# Altium PCB Pin_Expansion.PcbDoc
Units mm, origin at the board's own origin, x right, y up, seen from the top; angles counter-clockwise.
Board outline 45 x 47.5 mm, 2 copper layers (Top Layer, Bottom Layer); 3 components, 44 nets, 99 pads, 25 vias.
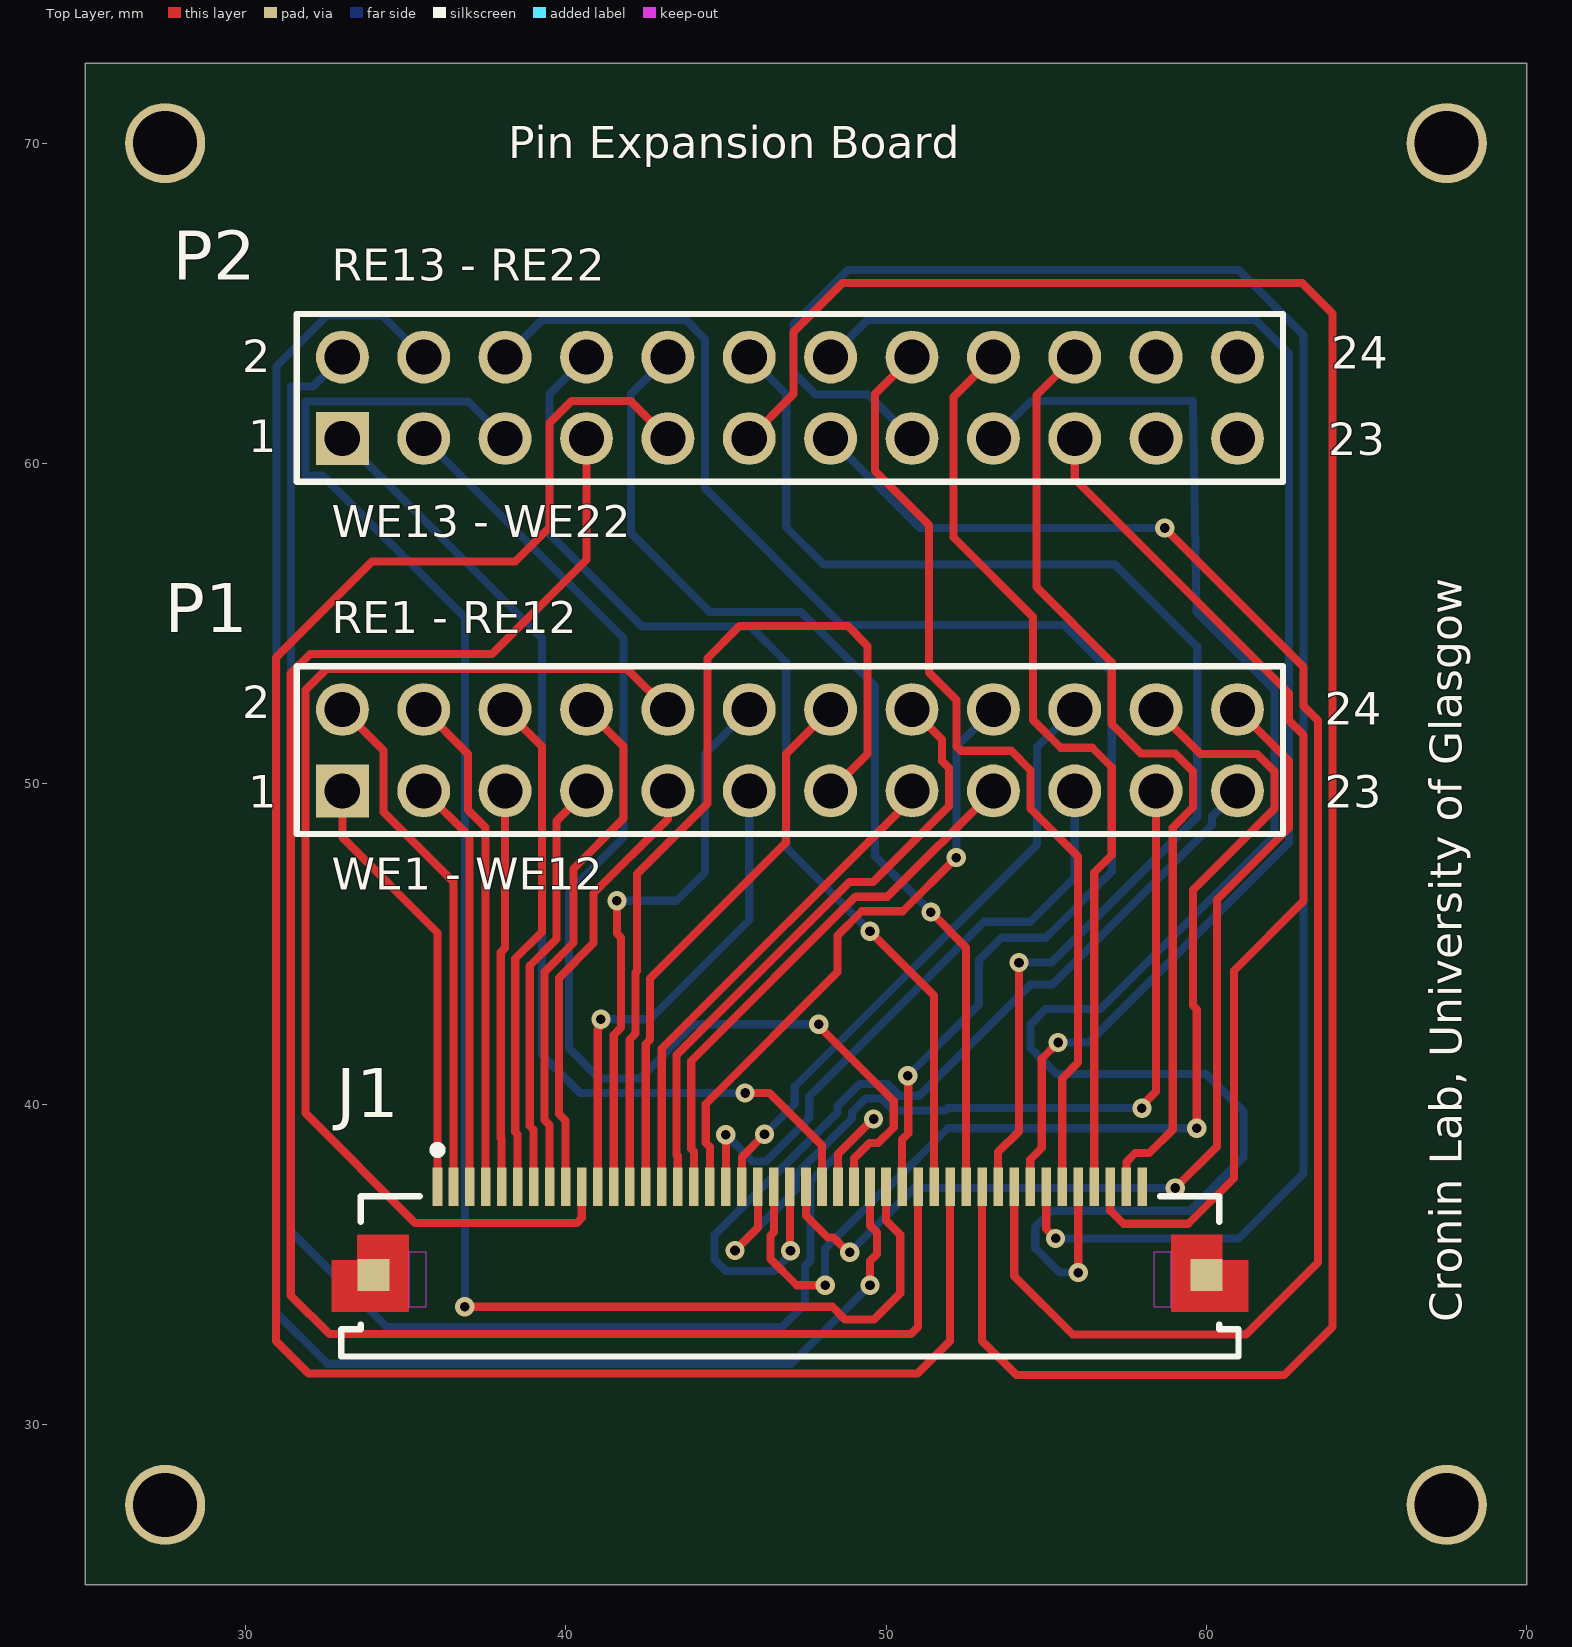
[diagram p0: Top Layer view]
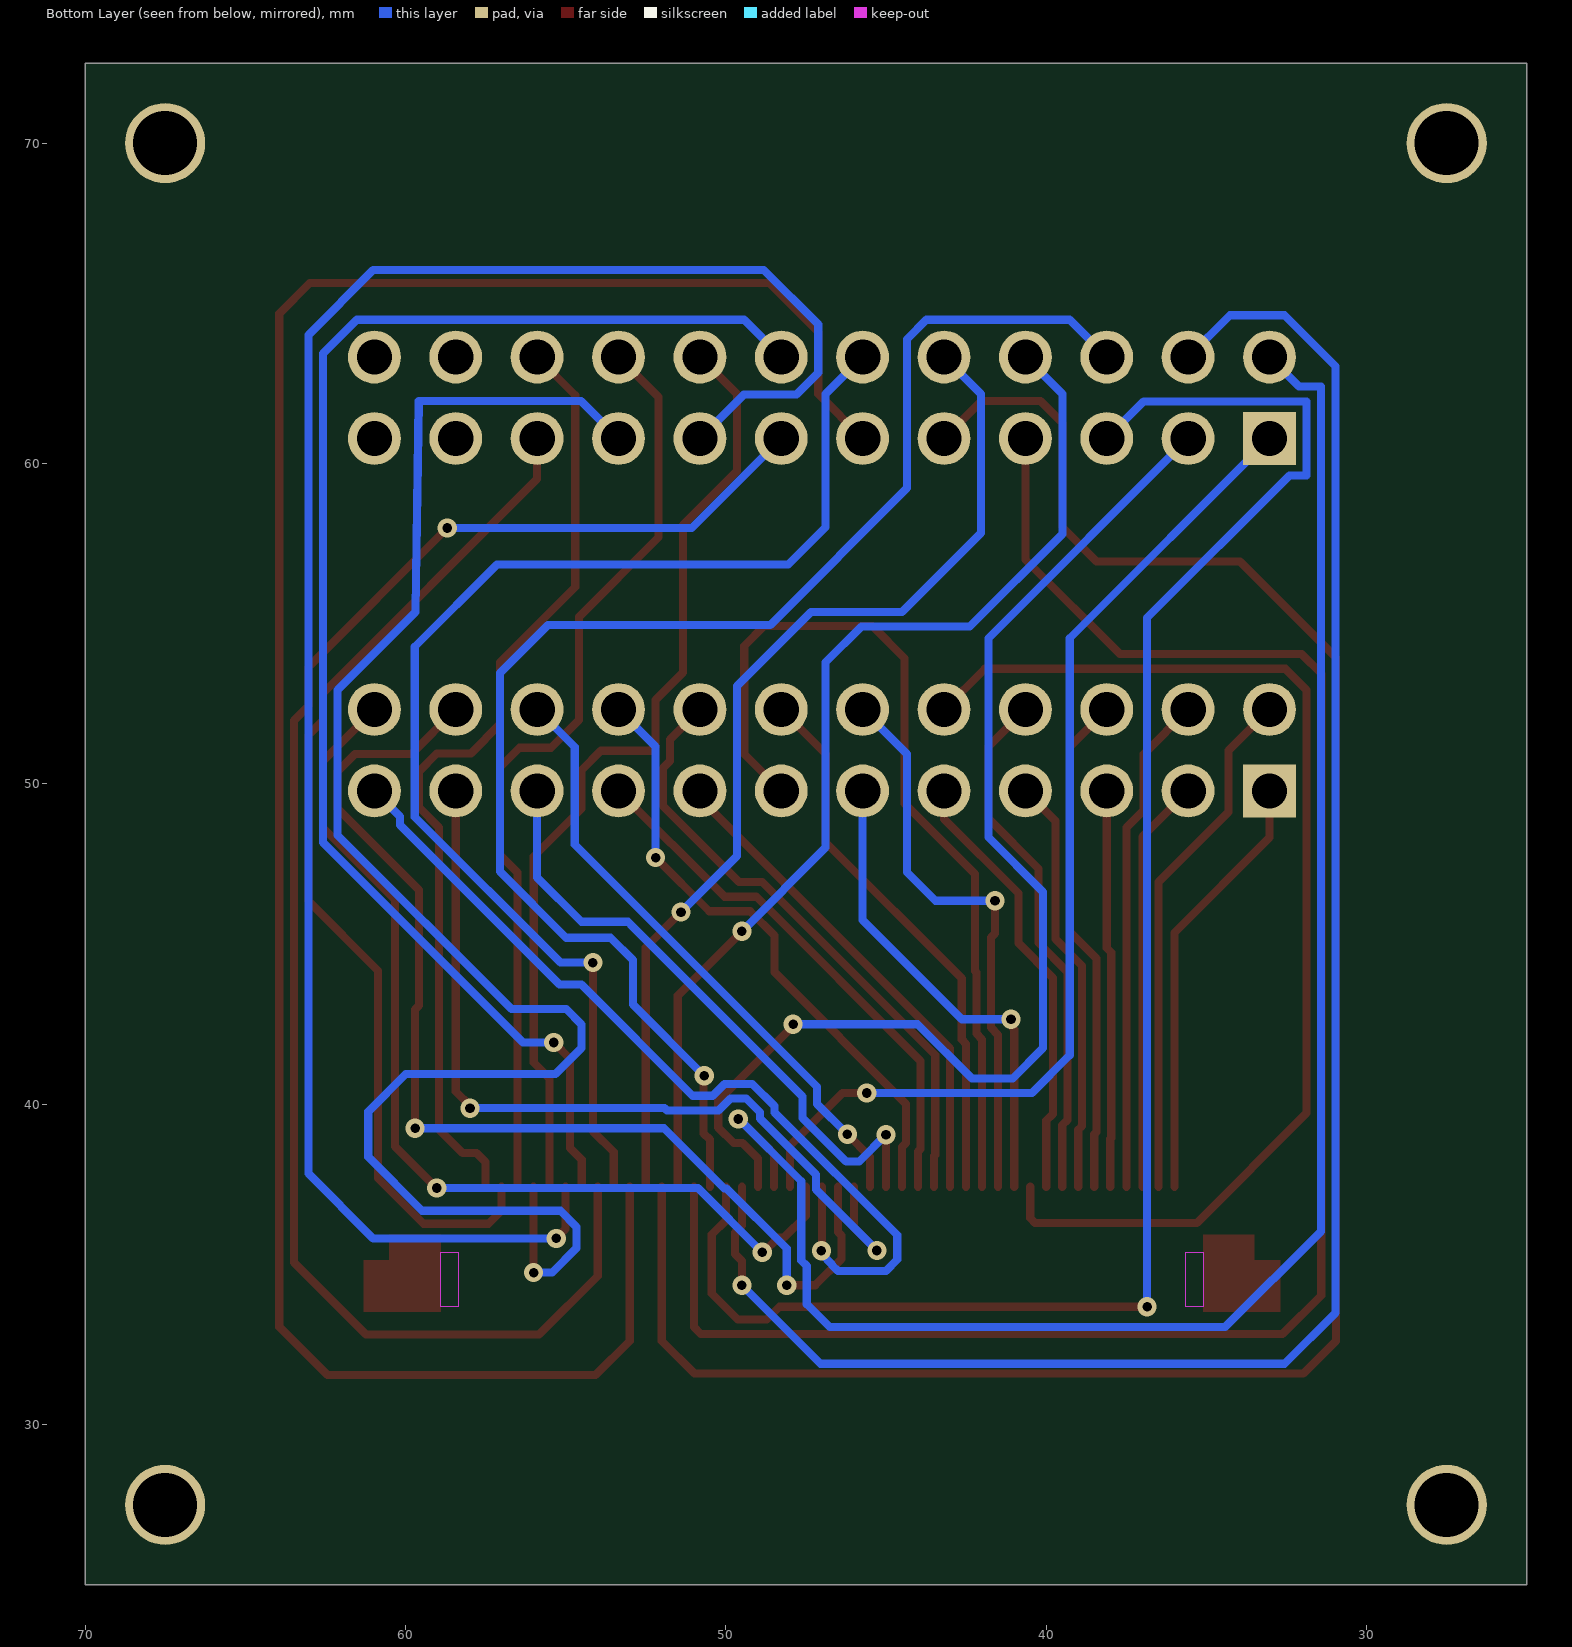
[diagram p1: Bottom Layer view, seen from below]
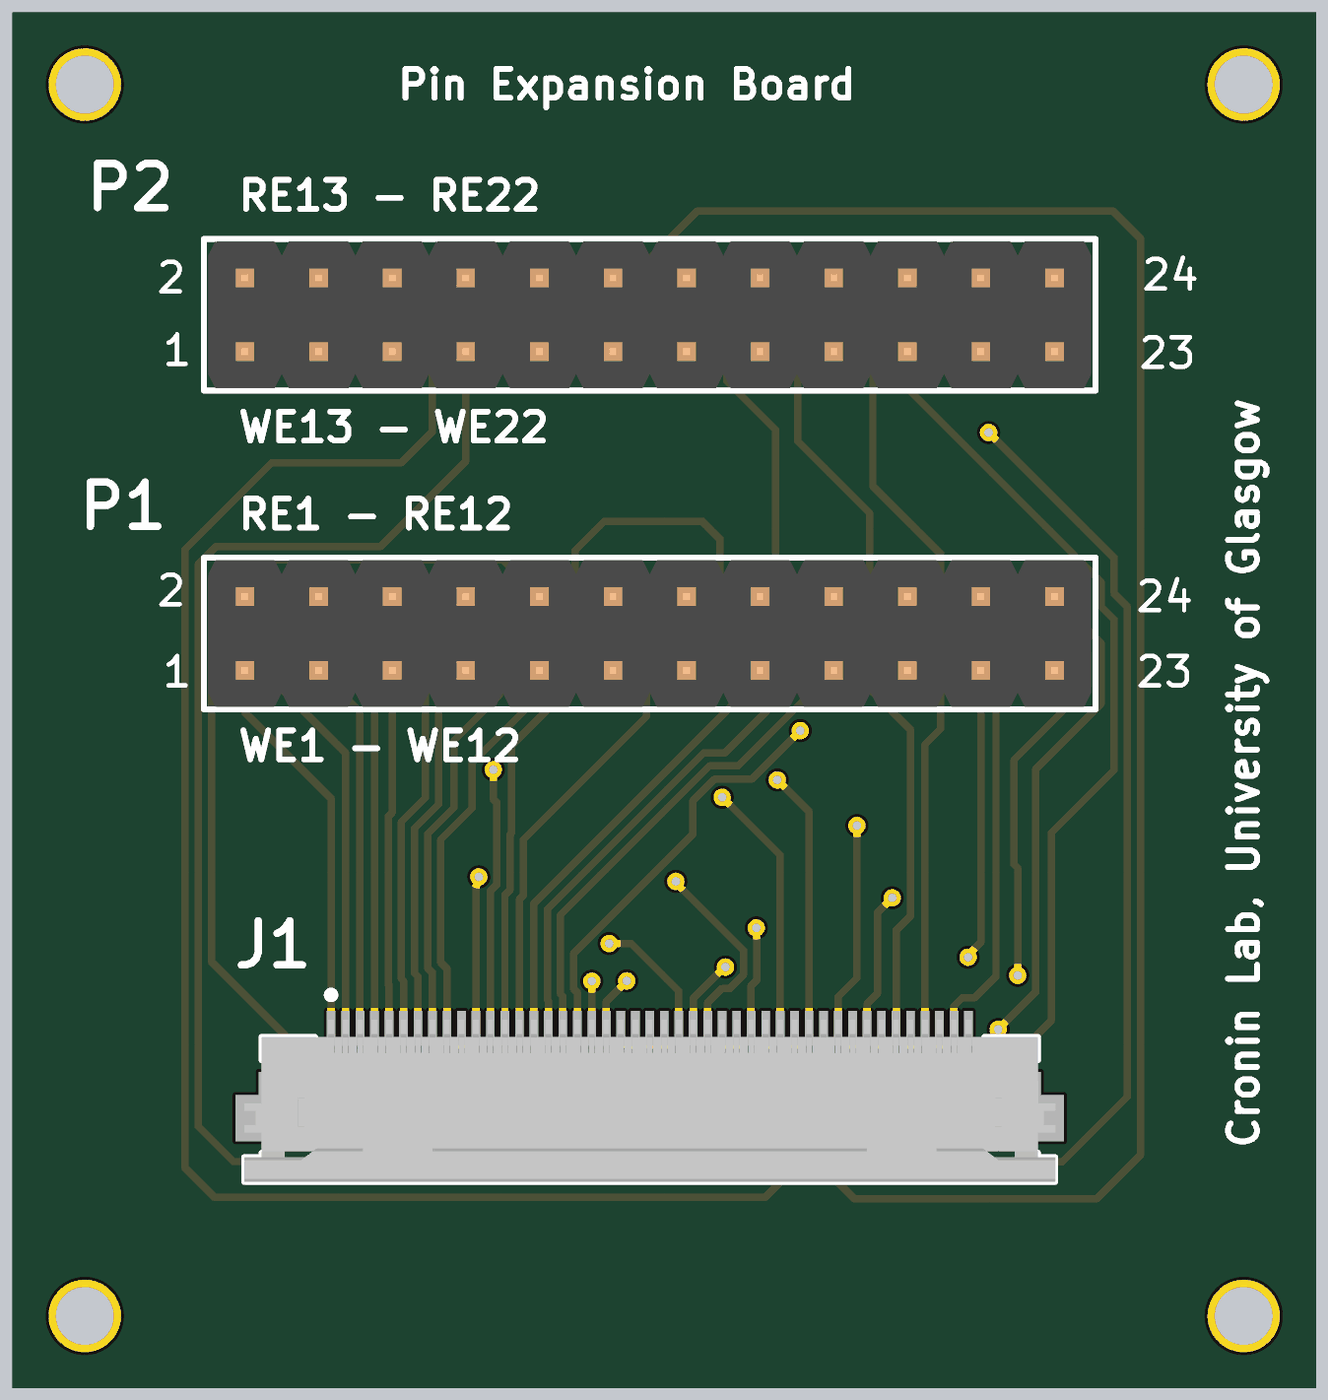
[diagram p2: 3D render of the assembled board from above, using the file's embedded part models]

## Layer stack, top to bottom
Top Solder: solder mask 0.0102, Solder Resist, Dk 3.5
Top Layer: signal copper 0.0356
Dielectric 1: dielectric 0.32, FR-4, Dk 4.8
Bottom Layer: signal copper 0.0356
Bottom Solder: solder mask 0.0102, Solder Resist, Dk 3.5

## Board outline
25,25 70,25 70,72.5 25,72.5

## Design rules (kind name [scope] priority, off if disabled: settings)
Clearance [All] p1: gap=0.2 ignorepadtopadclearanceinfootprint=FALSE
PolygonConnect [All] p1: connectstyle=Relief reliefconductorwidth=0.254 reliefentries=4 polygonreliefangle="90 Angle" airgapwidth=0.254
RoutingVias [All] p1: holewidth=0.3 width=0.6 viastyle="Through Hole" minholewidth=0.3 minwidth=0.6 maxholewidth=0.3 maxwidth=0.6
SMDNeckDown [All] p1: percent=100.000
SolderMaskExpansion [All] p1: expansion=0.102 istentingtop=FALSE
Width [All] p1: maxlimit=0.254 minlimit=0.254 preferedwidth=0.254
30 further rules are at their usual default settings.

## Components (designator, comment, footprint, x,y, rotation, side; value= is the part's Value field where it differs from the comment)
J1 "54132-4562" MOLX-54132-4562 47,36.054 r0 top
P1 "61302421121" 61302421121 47,51.054 r0 top
P2 "61302421121" 61302421121 47,62.054 r0 top

## Footprints (in the part's own frame and the unit in brackets; to place one, negate y for a bottom-side part, rotate by r counter-clockwise, add the part's x,y. Pads: shape width x height; smd on the part's side, far side on the other; paste and mask are expansions set on the pad)
61302421121 [mm] "Pin Header, pitch 2.54 mm, THT, Vertical, dual row, 24p"
  rect 1.65x1.65 hole 1.1: 1(-13.97,-1.27)
  round 1.65 hole 1.1: 2(-13.97,1.27) 3(-11.43,-1.27) 4(-11.43,1.27) 5(-8.89,-1.27) 6(-8.89,1.27) 7(-6.35,-1.27) 8(-6.35,1.27) 9(-3.81,-1.27) 10(-3.81,1.27) 11(-1.27,-1.27) 12(-1.27,1.27) 13(1.27,-1.27) 14(1.27,1.27) 15(3.81,-1.27) 16(3.81,1.27) 17(6.35,-1.27) 18(6.35,1.27) 19(8.89,-1.27) 20(8.89,1.27) 21(11.43,-1.27) 22(11.43,1.27) 23(13.97,-1.27) 24(13.97,1.27)
  silkscreen extent -15.39,-2.62 15.39,2.61, body extent -15.24,-2.54 15.24,2.54, height 8.59
MOLX-54132-4562 [mm] "FPC Connector, 45-Leads, Right Angle, Pitch 0.5 mm, Mated Height 2.0 mm, SMT"
  rect 0.3x1.2 smd: 1(-11,1.375) 2(-10.5,1.375) 3(-10,1.375) 4(-9.5,1.375) 5(-9,1.375) 6(-8.5,1.375) 7(-8,1.375) 8(-7.5,1.375) 9(-7,1.375) 10(-6.5,1.375) 11(-6,1.375) 12(-5.5,1.375) 13(-5,1.375) 14(-4.5,1.375) 15(-4,1.375) 16(-3.5,1.375) 17(-3,1.375) 18(-2.5,1.375) 19(-2,1.375) 20(-1.5,1.375) 21(-1,1.375) 22(-0.5,1.375) 23(0,1.375) 24(0.5,1.375) 25(1,1.375) 26(1.5,1.375) 27(2,1.375) 28(2.5,1.375) 29(3,1.375) 30(3.5,1.375) 31(4,1.375) 32(4.5,1.375) 33(5,1.375) 34(5.5,1.375) 35(6,1.375) 36(6.5,1.375) 37(7,1.375) 38(7.5,1.375) 39(8,1.375) 40(8.5,1.375) 41(9,1.375) 42(9.5,1.375) 43(10,1.375) 44(10.5,1.375) 45(11,1.375)
  rect 1x1 smd: MP1(-13,-1.375) MP2(13,-1.375)
  Top Layer region: -11.9,-0.125 -13.5,-0.125 -13.5,-0.925 -14.3,-0.925 -14.3,-2.525 -11.9,-2.525
  Top Layer region: 11.9,-0.125 13.5,-0.125 13.5,-0.925 14.3,-0.925 14.3,-2.525 11.9,-2.525
  Keep-Out Layer region: -11.9,-2.375 -11.35,-2.375 -11.35,-0.675 -11.9,-0.675
  Keep-Out Layer region: 11.9,-0.675 11.35,-0.675 11.35,-2.375 11.9,-2.375
  silkscreen extent -14,-3.92 14,2.65, body extent -14,-3.92 14,1.68, height 2.01

## Part data
J1: library part CMP-1241-00535-1, "0.5 mm Pitch Easy-On(TM) Type FPC Connector, 2.0 mm Mated Height, Right Angle, ZIF, SMT, Bottom Contact, 45 Circuits, -20 to 85 degC, ELV and RoHS Compliant, Tape and Reel", Current (Max per Contact)=0.5A, Manufacturer=Molex, Voltage (Max)=50V, Circuits (Loaded)=45, ComponentLink1Description="Manufacturer URL", ComponentLink1URL=http://www.molex.com/molex/index.jsp, ComponentLink2Description=Datasheet, ComponentLink2URL=http://www.molex.com/webdocs/datasheets/pdf/en-us/0541324562_FFC_FPC_CONNECTORS.pdf, ComponentLink3Description="Package Specification", ComponentLink3URL=http://www.molex.com/pdm_docs/sd/541324562_sd.pdf, Contact Position=Bottom, Durability (mating cycles max)=20, Entry Angle="90degrees Angle", Mated Height=2.00mm, Material - Metal="Phosphor Bronze", Material - Plating Mating=Gold, Material - Plating Termination=Gold, Mounting Technology="Surface Mount", Number of Rows=1, Orientation="Right Angle", PackageDescription="45-Lead FPC Connector, Pitch 0.5 mm", PackageReference=54132-4562, PackageVersion="Rev. F, 07/2010", Packing="Tape and Reel", PartNumber=54132-4562, PCB Locator=No, PCB Retention=Yes, Pitch - Mating Interface=0.50mm, Polarized to PCB=Yes, RoHS=TRUE, Stackable=No
P1 P2: library part CMP-1502-01111-1, "THT Vertical Pin Header WR-PHD, Pitch 2.54 mm, Dual Row, 24 pins", Contact Resistance=20mOhm, Manufacturer="Wurth Elektronik", Operating Temperature=-40to105degC, Rated Current=3A, Withstanding Voltage=500VAC, Working Voltage=250VAC, Datasheet URL=https://katalog.we-online.de/em/datasheet/6130xx21121.pdf, Gender=Male, Manufacturer URL=http://www.we-online.de, Mounting Technology=THT, Orientation=Vertical, Package Reference=61302421121, Packaging=Bag, Part Number=61302421121, Pin Number=24, Pitch=2.54mm, Publisher=WurthElektronik, Row Number=Dual

## Free pads (board coordinates)
  round 2.5 hole 2: M1(27.5,27.5) M2(67.5,27.5) M3(67.5,70) M4(27.5,70)

## Via types
v1: diameter 0.6, hole 0.3, Top Layer to Bottom Layer, 25 vias

## Nets (pads, with @x,y where several pads share a name; then routed paths per layer and width w, separated by ;. In a path a pad name is that pad's centre, name@x,y a point inside that pad or via, vN(x,y) a via of type N, cw(c..) or ccw(c..) an arc to the next point about the centre after c; other vN are vias at no path point)
RE1: J1.2 P1.2 | length 16.3
  Top Layer w0.254: P1.2 34.313,51.041 34.313,49.124 36.5,46.936 J1.2
RE2: J1.4 P1.4 | length 15.7
  Top Layer w0.254: P1.4 36.954,50.94 36.954,49.187 37.5,48.641 J1.4
RE3: J1.6 P1.6 | length 15.7
  Top Layer w0.254: P1.6 39.262,51.172 39.262,45.384 38.426,44.548 38.426,39.139 38.5,39.065 J1.6
RE4: J1.8 P1.8 | length 16.5
  Top Layer w0.254: J1.8 39.5,39.349 39.334,39.515 39.334,44.137 40.242,45.045 40.242,47.353 41.806,48.917 41.806,51.168 P1.8
RE5: J1.10 P1.10 | length 36.4
  Top Layer w0.254: J1.10 40.5,36.449 40.351,36.3 35.3,36.3 31.874,39.726 31.874,52.934 32.535,53.594 41.92,53.594 P1.10
RE6: J1.12 P1.12 | length 17.8
  Top Layer w0.254: J1.12 41.5,42.167 41.727,42.394 41.727,45.206 41.6,45.333 v1(41.6,46.354)
  Bottom Layer w0.254: v1(41.6,46.354) 43.455,46.354 44.346,47.244 44.346,50.939 P1.12
RE7: J1.14 P1.14 | length 17.3
  Top Layer w0.254: J1.14 42.5,41.883 42.635,42.018 42.635,43.931 46.882,48.178 46.882,50.936 P1.14
RE8: J1.16 P1.16 | length 19.3
  Top Layer w0.254: J1.16 43.5,38.383 43.465,38.418 43.465,41.536 48.864,46.935 49.59,46.935 51.962,49.307 51.962,50.5 51.744,50.718 51.744,51.39 P1.16
RE9: J1.18 P1.18 | length 19.4
  Top Layer w0.254: J1.18 44.5,38.667 44.373,38.794 44.373,40.014 48.484,44.124 48.484,45.271 49.24,46.027 50.52,46.027 v1(52.194,47.701)
  Bottom Layer w0.254: v1(52.194,47.701) 52.194,51.168 P1.18
RE10: J1.20 P1.20 | length 19.2
  Top Layer w0.254: J1.20 45.5,38.359 v1(46.207,39.065)
  Bottom Layer w0.254: v1(46.207,39.065) 47.15,40.009 47.15,40.55 54.715,48.115 54.715,51.149 P1.20
RE11: J1.22 P1.22 | length 35.4
  Top Layer w0.254: J1.22 46.5,36.01 46.392,35.902 46.392,35.173 47.212,34.354 v1(48.1,34.354) ; P1.22 59.818,50.936 61.58,50.936 62.122,50.394 62.122,49.238 59.576,46.692 59.576,43.082 59.7,42.958 v1(59.7,39.254)
  Bottom Layer w0.254: v1(48.1,34.354) 48.1,35.503 49.975,37.378 50.05,37.378 51.925,39.254 v1(59.7,39.254)
RE12: J1.24 P1.24 | length 30.8
  Top Layer w0.254: J1.24 47.5,36.522 48.182,35.841 48.361,35.841 48.82,35.382 v1(48.866,35.382) ; v1(59.027,37.389) 60.327,38.689 60.327,46.385 62.576,48.634 62.576,50.718 P1.24
  Bottom Layer w0.254: v1(48.866,35.382) 50.873,37.389 v1(59.027,37.389)
RE13: J1.26 P2.2 | length 55.2
  Top Layer w0.254: J1.26 48.5,38.454 49.588,39.541 v1(49.612,39.541)
  Bottom Layer w0.254: P2.2 32.114,62.408 31.424,62.408 31.424,36.036 34.414,33.046 46.759,33.046 47.473,33.76 47.473,34.954 47.646,35.127 47.646,37.6 49.588,39.541 v1(49.612,39.541)
RE14: J1.28 P2.4 | length 58.8
  Top Layer w0.254: v1(49.5,34.354) 49.5,35.113 49.719,35.332 49.719,35.997 49.5,36.216 J1.28
  Bottom Layer w0.254: P2.4 34.265,64.629 32.56,64.629 30.97,63.039 30.97,33.493 32.56,31.903 47.049,31.903 v1(49.5,34.354)
RE15: J1.30 P2.6 | length 46.3
  Top Layer w0.254: J1.30 50.5,38.9 50.693,39.094 50.693,40.876 v1(50.676,40.893)
  Bottom Layer w0.254: P2.6 39.277,64.491 43.736,64.491 44.346,63.881 44.346,59.233 48.613,54.966 55.547,54.966 57.046,53.467 57.046,47.262 54.984,45.2 53.6,45.2 52.9,44.5 52.9,43.116 v1(50.676,40.893)
RE16: J1.32 P2.8 | length 33.3
  Top Layer w0.254: v1(49.5,45.4) 51.5,43.4 J1.32
  Bottom Layer w0.254: P2.8 39.494,62.168 39.494,57.807 42.387,54.915 45.768,54.915 46.886,53.797 46.886,48.014 v1(49.5,45.4)
RE17: J1.34 P2.10 | length 32.4
  Top Layer w0.254: v1(51.4,46) 52.5,44.9 J1.34
  Bottom Layer w0.254: P2.10 42.034,62.168 42.034,57.836 44.498,55.372 47.343,55.372 49.654,53.061 49.654,47.752 51.4,46.006 v1(51.4,46)
RE18: J1.36 P2.12 | length 40.2
  Top Layer w0.254: J1.36 53.5,38.507 54.15,39.157 v1(54.15,44.425)
  Bottom Layer w0.254: P2.12 46.886,62.168 46.886,58.014 48.054,56.845 57.147,56.845 59.711,54.281 59.711,48.97 55.166,44.425 v1(54.15,44.425)
RE19: J1.38 P2.14 | length 45.1
  Top Layer w0.254: J1.38 54.5,38.272 54.861,38.634 54.861,41.423 v1(55.369,41.931)
  Bottom Layer w0.254: P2.14 49.437,64.491 61.516,64.491 62.576,63.431 62.576,48.178 56.329,41.931 v1(55.369,41.931)
RE20: J1.40 P2.16 | length 30.1
  Top Layer w0.254: P2.16 49.654,62.168 49.654,60.817 49.654,59.766 51.341,58.08 51.341,53.476 52.198,52.619 52.198,51.172 52.332,51.038 53.896,51.038 54.506,50.429 54.506,49.225 55.996,47.735 55.996,41.304 55.5,40.808 J1.40
RE21: J1.42 P2.18 | length 29.3
  Top Layer w0.254: P2.18 52.1,62.074 52.1,57.702 54.584,55.217 54.584,52 55.454,51.13 56.436,51.13 57.046,50.521 57.046,47.778 56.5,47.232 J1.42
RE22: J1.44 P2.20 | length 30.2
  Top Layer w0.254: P2.20 54.7,62.134 54.7,56.143 57.046,53.797 57.046,51.867 57.96,50.953 59.023,50.953 59.582,50.394 59.582,49.273 58.951,48.641 58.951,39.218 58.214,38.481 57.779,38.481 57.5,38.202 J1.44
WE1: J1.1 P1.1 | length 13.6
  Top Layer w0.254: P1.1 33.03,48.327 36,45.357 J1.1
WE2: J1.3 P1.3 | length 12.9
  Top Layer w0.254: P1.3 37,48.354 J1.3
WE3: J1.5 P1.5 | length 12.4
  Top Layer w0.254: J1.5 38,38.923 37.972,38.951 37.972,44.737 38.11,44.875 P1.5
WE4: J1.7 P1.7 | length 13.1
  Top Layer w0.254: J1.7 39,39.207 38.88,39.327 38.88,44.325 39.716,45.161 39.716,48.85 P1.7
WE5: J1.9 P1.9 | length 13.9
  Top Layer w0.254: J1.9 40,39.491 39.788,39.703 39.788,43.949 40.869,45.03 40.869,46.587 43.19,48.908 P1.9
WE6: J1.11 P1.11 | length 15.2
  Top Layer w0.254: J1.11 41,39.133 41,42.332 41.034,42.366 41.034,42.588 v1(41.1,42.654)
  Bottom Layer w0.254: v1(41.1,42.654) 42.625,42.654 45.73,45.758 P1.11
WE7: J1.13 P1.13 | length 28.2
  Top Layer w0.254: J1.13 42,42.025 42.181,42.206 42.181,44.119 42.227,44.165 42.227,47.191 44.424,49.388 44.424,53.924 45.426,54.926 48.809,54.926 49.426,54.309 49.426,50.939 P1.13
WE8: J1.15 P1.15 | length 15.6
  Top Layer w0.254: J1.15 43,41.741 50.81,49.551 P1.15
WE9: J1.17 P1.17 | length 16.9
  Top Layer w0.254: J1.17 44,38.525 43.919,38.606 43.919,41.348 49.052,46.481 50.047,46.481 P1.17
WE10: J1.19 P1.19 | length 19.6
  Top Layer w0.254: J1.19 v1(45,39.054)
  Bottom Layer w0.254: v1(45,39.054) 45.838,38.216 46.244,38.216 47.604,39.576 47.604,40.247 52.908,45.551 53.057,45.7 54.147,45.7 54.511,45.7 55.89,47.079 P1.19
WE11: J1.21 P1.21 | length 27.6
  Top Layer w0.254: v1(45.285,35.438) 46,36.152 J1.21 ; v1(57.987,39.881) 57.987,39.957 58.43,40.401 P1.21
  Bottom Layer w0.254: v1(45.285,35.438) 47.192,37.344 47.192,37.815 48.938,39.562 48.938,39.754 49.365,40.181 49.86,40.181 50.229,39.812 51.841,39.812 51.91,39.881 v1(57.987,39.881)
WE12: J1.23 P1.23 | length 28.3
  Top Layer w0.254: J1.23 47,35.452 v1(47.019,35.433)
  Bottom Layer w0.254: v1(47.019,35.433) 47.019,35.34 46.684,35.005 46.684,34.978 46.505,34.798 45.006,34.798 44.65,35.154 44.65,35.916 48.484,39.75 48.484,39.942 49.177,40.635 50.048,40.635 50.417,40.266 51.032,40.266 54.506,43.739 55.191,43.739 60.17,48.717 60.17,48.984 P1.23
WE13: J1.25 P2.1 | length 33
  Top Layer w0.254: v1(45.6,40.354) 46.356,40.354 48,38.71 J1.25
  Bottom Layer w0.254: P2.1 39.266,54.548 39.266,41.534 40.445,40.354 v1(45.6,40.354)
WE14: J1.27 P2.3 | length 37.9
  Top Layer w0.254: v1(47.9,42.5) 47.9,42.445 50.239,40.106 50.239,39.282 49.754,38.797 49.485,38.797 49,38.312 J1.27
  Bottom Layer w0.254: P2.3 41.806,54.548 41.806,48.336 40.1,46.631 40.1,41.754 41.046,40.808 42.321,40.808 44.013,42.5 v1(47.9,42.5)
WE15: J1.29 P2.5 | length 54.9
  Top Layer w0.254: v1(36.853,33.681) 48.324,33.681 48.722,33.282 49.629,33.282 50.442,34.095 50.442,35.931 50,36.373 J1.29
  Bottom Layer w0.254: v1(36.853,33.681) 36.853,55.187 32.408,59.632 31.878,59.632 31.878,61.936 36.958,61.936 P2.5
WE16: J1.31 P2.7 | length 58.5
  Top Layer w0.254: P2.7 40.65,56.998 37.704,54.051 32.027,54.051 31.417,53.442 31.417,34.036 32.625,32.828 50.783,32.828 51,33.045 J1.31
WE17: J1.33 P2.9 | length 66
  Top Layer w0.254: P2.9 42.023,61.951 40.18,61.951 39.494,61.265 39.494,58.014 38.427,56.947 33.957,56.947 30.96,53.95 30.96,32.614 31.976,31.598 50.984,31.598 52,32.614 J1.33
WE18: J1.35 P2.11 | length 70.2
  Top Layer w0.254: P2.11 47.114,62.168 47.114,64.11 48.638,65.634 62.989,65.634 63.938,64.685 63.938,33.055 62.43,31.547 54.067,31.547 53,32.614 J1.35
WE19: J1.37 P2.13 | length 50.4
  Top Layer w0.254: J1.37 54,34.646 55.829,32.817 61.237,32.817 63.484,35.064 63.484,51.979 63.03,52.433 63.03,53.655 v1(58.697,57.988)
  Bottom Layer w0.254: P2.13 51.065,57.988 v1(58.697,57.988)
WE20: J1.39 P2.15 | length 60
  Top Layer w0.254: J1.39 55,36.107 v1(55.293,35.814)
  Bottom Layer w0.254: P2.15 49.44,62.154 47.8,62.154 47.114,62.84 47.114,64.338 48.816,66.04 61.008,66.04 63.03,64.018 63.03,37.836 61.008,35.814 v1(55.293,35.814)
WE21: J1.41 P2.17 | length 53.4
  Top Layer w0.254: v1(56,34.747) J1.41
  Bottom Layer w0.254: P2.17 54.517,61.951 59.586,61.951 59.687,55.372 62.122,52.937 62.122,48.398 56.694,42.97 54.981,42.97 54.506,42.494 54.506,41.758 55.318,40.945 59.992,40.945 61.16,39.777 61.16,38.354 59.484,36.678 55.166,36.678 54.658,36.17 54.658,35.509 55.42,34.747 v1(56,34.747)
WE22: J1.43 P2.19 | length 32.3
  Top Layer w0.254: P2.19 55.89,59.518 62.576,52.832 62.576,51.979 63.03,51.525 63.03,46.345 60.856,44.171 60.856,37.694 59.433,36.271 57.406,36.271 57,36.678 J1.43
pads on no net: J1.45 J1.MP1 J1.MP2 P2.21 P2.22 P2.23 P2.24

## Silkscreen, mask and mechanical layers (free items; w line width, h text height)
Top Overlay:
  text "Pin Expansion Board" at 38.2,69.533 h1
  text "RE13 - RE22" at 32.7,65.7 h1
  text "WE13 - WE22" at 32.7,57.7 h1
  text "RE1 - RE12" at 32.7,54.7 h1
  text "WE1 - WE12" at 32.7,46.7 h1
  text "Cronin Lab, University of Glasgow" at 67.967,33.2 h1 r90

## Text inside footprints (layer, text, board x,y; h text height)
P1: Top Overlay "24" at 63.7,51.854 h1.02; Top Overlay "23" at 63.7,49.254 h1.02; Top Overlay "2" at 29.9,52.054 h1.02; Top Overlay "1" at 30.1,49.254 h1.02
P2: Top Overlay "24" at 63.9,62.954 h1.02; Top Overlay "23" at 63.8,60.254 h1.02; Top Overlay "2" at 29.9,62.854 h1.02; Top Overlay "1" at 30.1,60.354 h1.02